# Altium PCB Side PCB.PcbDoc
Units mil, origin at the board's own origin, x right, y up, seen from the top; angles counter-clockwise.
Board outline 6000 x 4000 mil, 2 copper layers (Top Layer, Bottom Layer); 2 components, 55 nets, 11 pads, 0 vias.
Unrouted connection lines stored in the file: 1.
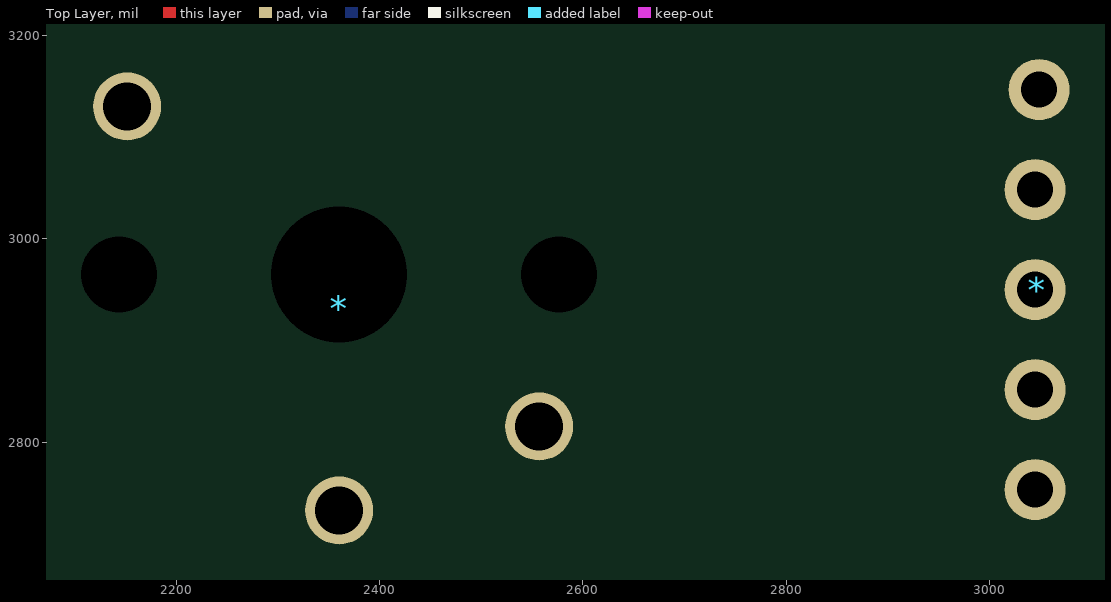
[diagram p0: Top Layer view]
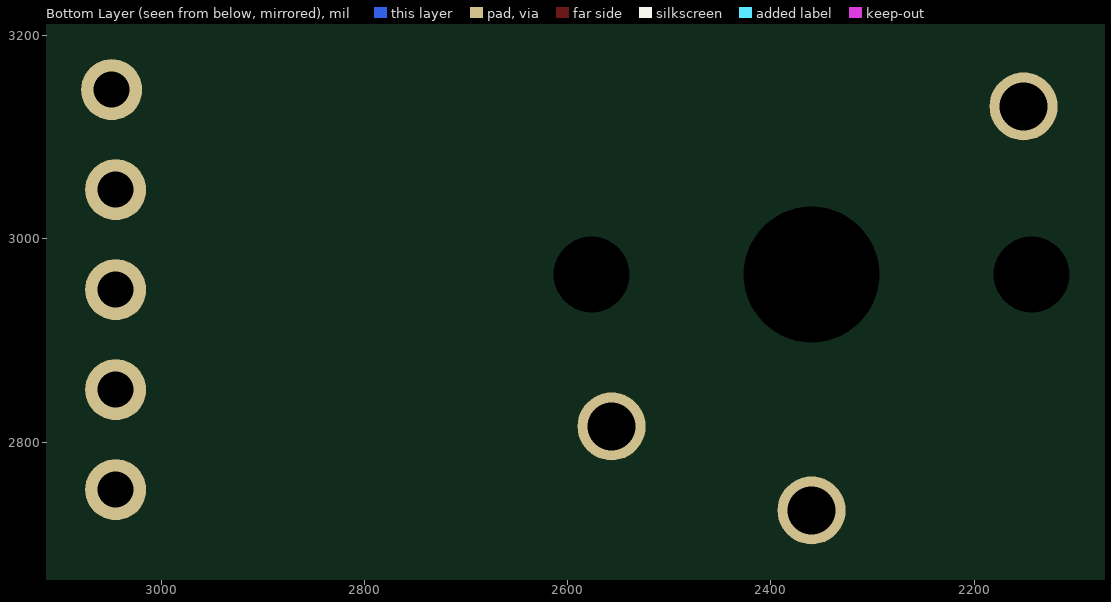
[diagram p1: Bottom Layer view, seen from below]

## Layer stack, top to bottom
Top Solder: solder mask 0.4, Solder Resist, Dk 3.5
Top Layer: signal copper 1.4
Dielectric 1: dielectric 12.6, FR-4, Dk 4.8
Bottom Layer: signal copper 1.4
Bottom Solder: solder mask 0.4, Solder Resist, Dk 3.5

## Board outline
1000,1000 7000,1000 7000,5000 1000,5000

## Design rules (kind name [scope] priority, off if disabled: settings)
Clearance [All] p1: gap=10 ignorepadtopadclearanceinfootprint=FALSE except(0: Arc-Hole Track-Hole SMDPad-Hole THPad-Hole Via-Hole Fill-Hole Poly-Hole Region-Hole Text-Hole)
PolygonConnect [All] p1: connectstyle=Relief reliefconductorwidth=10 reliefentries=4 polygonreliefangle="90 Angle" airgapwidth=10
RoomDefinition "Side PCB" [InComponentClass('Side PCB')] p1: confinementstyle=ConfineIn formatcopy=TRUE lockcomponents=FALSE outline 1680,2395 3750,2395 3750,3600 1680,3600
RoutingVias [All] p1: holewidth=28 width=50 viastyle="Through Hole" minholewidth=28 minwidth=50 maxholewidth=28 maxwidth=50
SolderMaskExpansion [All] p1: expansion=4
Width [All] p1: maxlimit=10 minlimit=10 preferedwidth=10
30 further rules are at their usual default settings.

## Classes and differential pairs
component class "Side PCB": R3

## Components (designator, comment, footprint, x,y, rotation, side; value= is the part's Value field where it differs from the comment)
* "KAILH_LOW_PROFILE" KAILH_LOW_PROFILE 2354.57,2969.72 r90 top
* "JST_SE5PIN" JST_SE5PIN 3048.94,3146.85 r90 top

## Footprints (in the part's own frame and the unit in brackets; to place one, negate y for a bottom-side part, rotate by r counter-clockwise, add the part's x,y. Pads: shape width x height; smd on the part's side, far side on the other; paste and mask are expansions set on the pad)
JST_SE5PIN [mm] "for side PCB"
  round 1.524 hole 0.9: 1(0,0) 2(-2.5,0.1) 3(-5,0.1) 4(-7.5,0.1) 5(-10,0.1)
  body extent -12.4,-3.25 2.37,2.42, height 7
KAILH_LOW_PROFILE [mm]
  round 1.7 hole 1.2: 0(-6.02,-0.138) 1(-3.92,-5.138) ""(4.08,5.162)
  round 1.524 hole 1.9: ""(-0.12,5.362) ""(-0.12,-5.638)
  round 1.524 hole 3.4: ""(-0.12,-0.138)
  body extent -7.82,-7.74 7.18,7.26, height 8

## Nets (pads, with @x,y where several pads share a name; then routed paths per layer and width w, separated by ;. In a path a pad name is that pad's centre, name@x,y a point inside that pad or via, vN(x,y) a via of type N, cw(c..) or ccw(c..) an arc to the next point about the centre after c; other vN are vias at no path point)
3.3V: 
+3.3: *.1@2556.85,2815.39 *.3
+5: 
GND: *.5
Net1_0: 
Net1_1: 
Net1_2: 
Net1_3: 
Net1_4: 
Net1_5: 
Net1_6: 
Net1_7: 
Net1_8: 
Net1_9: 
Net1_10: 
Net1_11: 
Net1_12: 
Net1_13: 
Net1_14: 
Net1_15: 
Net1_16: 
Net1_17: 
Net1_18: 
Net1_19: 
Net1_20: 
Net1_21: 
Net1_22: 
Net1_23: 
Net1_24: 
Net1_25: 
Net1_26: 
Net1_27: 
Net1_28: 
Net1_29: 
Net1_30: 
Net1_31: 
Net1_32: 
Net1_33: 
Net1_34: 
Net1_35: 
Net1_36: 
Net1_37: 
Net1_38: 
Net1_39: 
Net1_A21: 
Net1_A22: 
Net*_0: *.1@3048.94,3146.85
NetC7_1: 
NetCANC_1: 
NetCANC_2: 
NetCANR_1: 
"NetHeader 4_2": 
NetP2_19: 
NetR6_2: 
NetU1_4: 
pads on no net: *. *.0 *.2 *.4